# Altium PCB Mini-Rambo.PcbDoc (part 2 of 3)
Units mil, origin at the board's own origin, x right, y up, seen from the top; angles counter-clockwise.
Board outline 4133.86 x 2795.28 mil, 4 copper layers (Top, GND, Supply, Bottom), stack 61.811 mil thick; 295 components, 208 nets, 992 pads, 488 vias.
Unrouted connection lines stored in the file: 73.
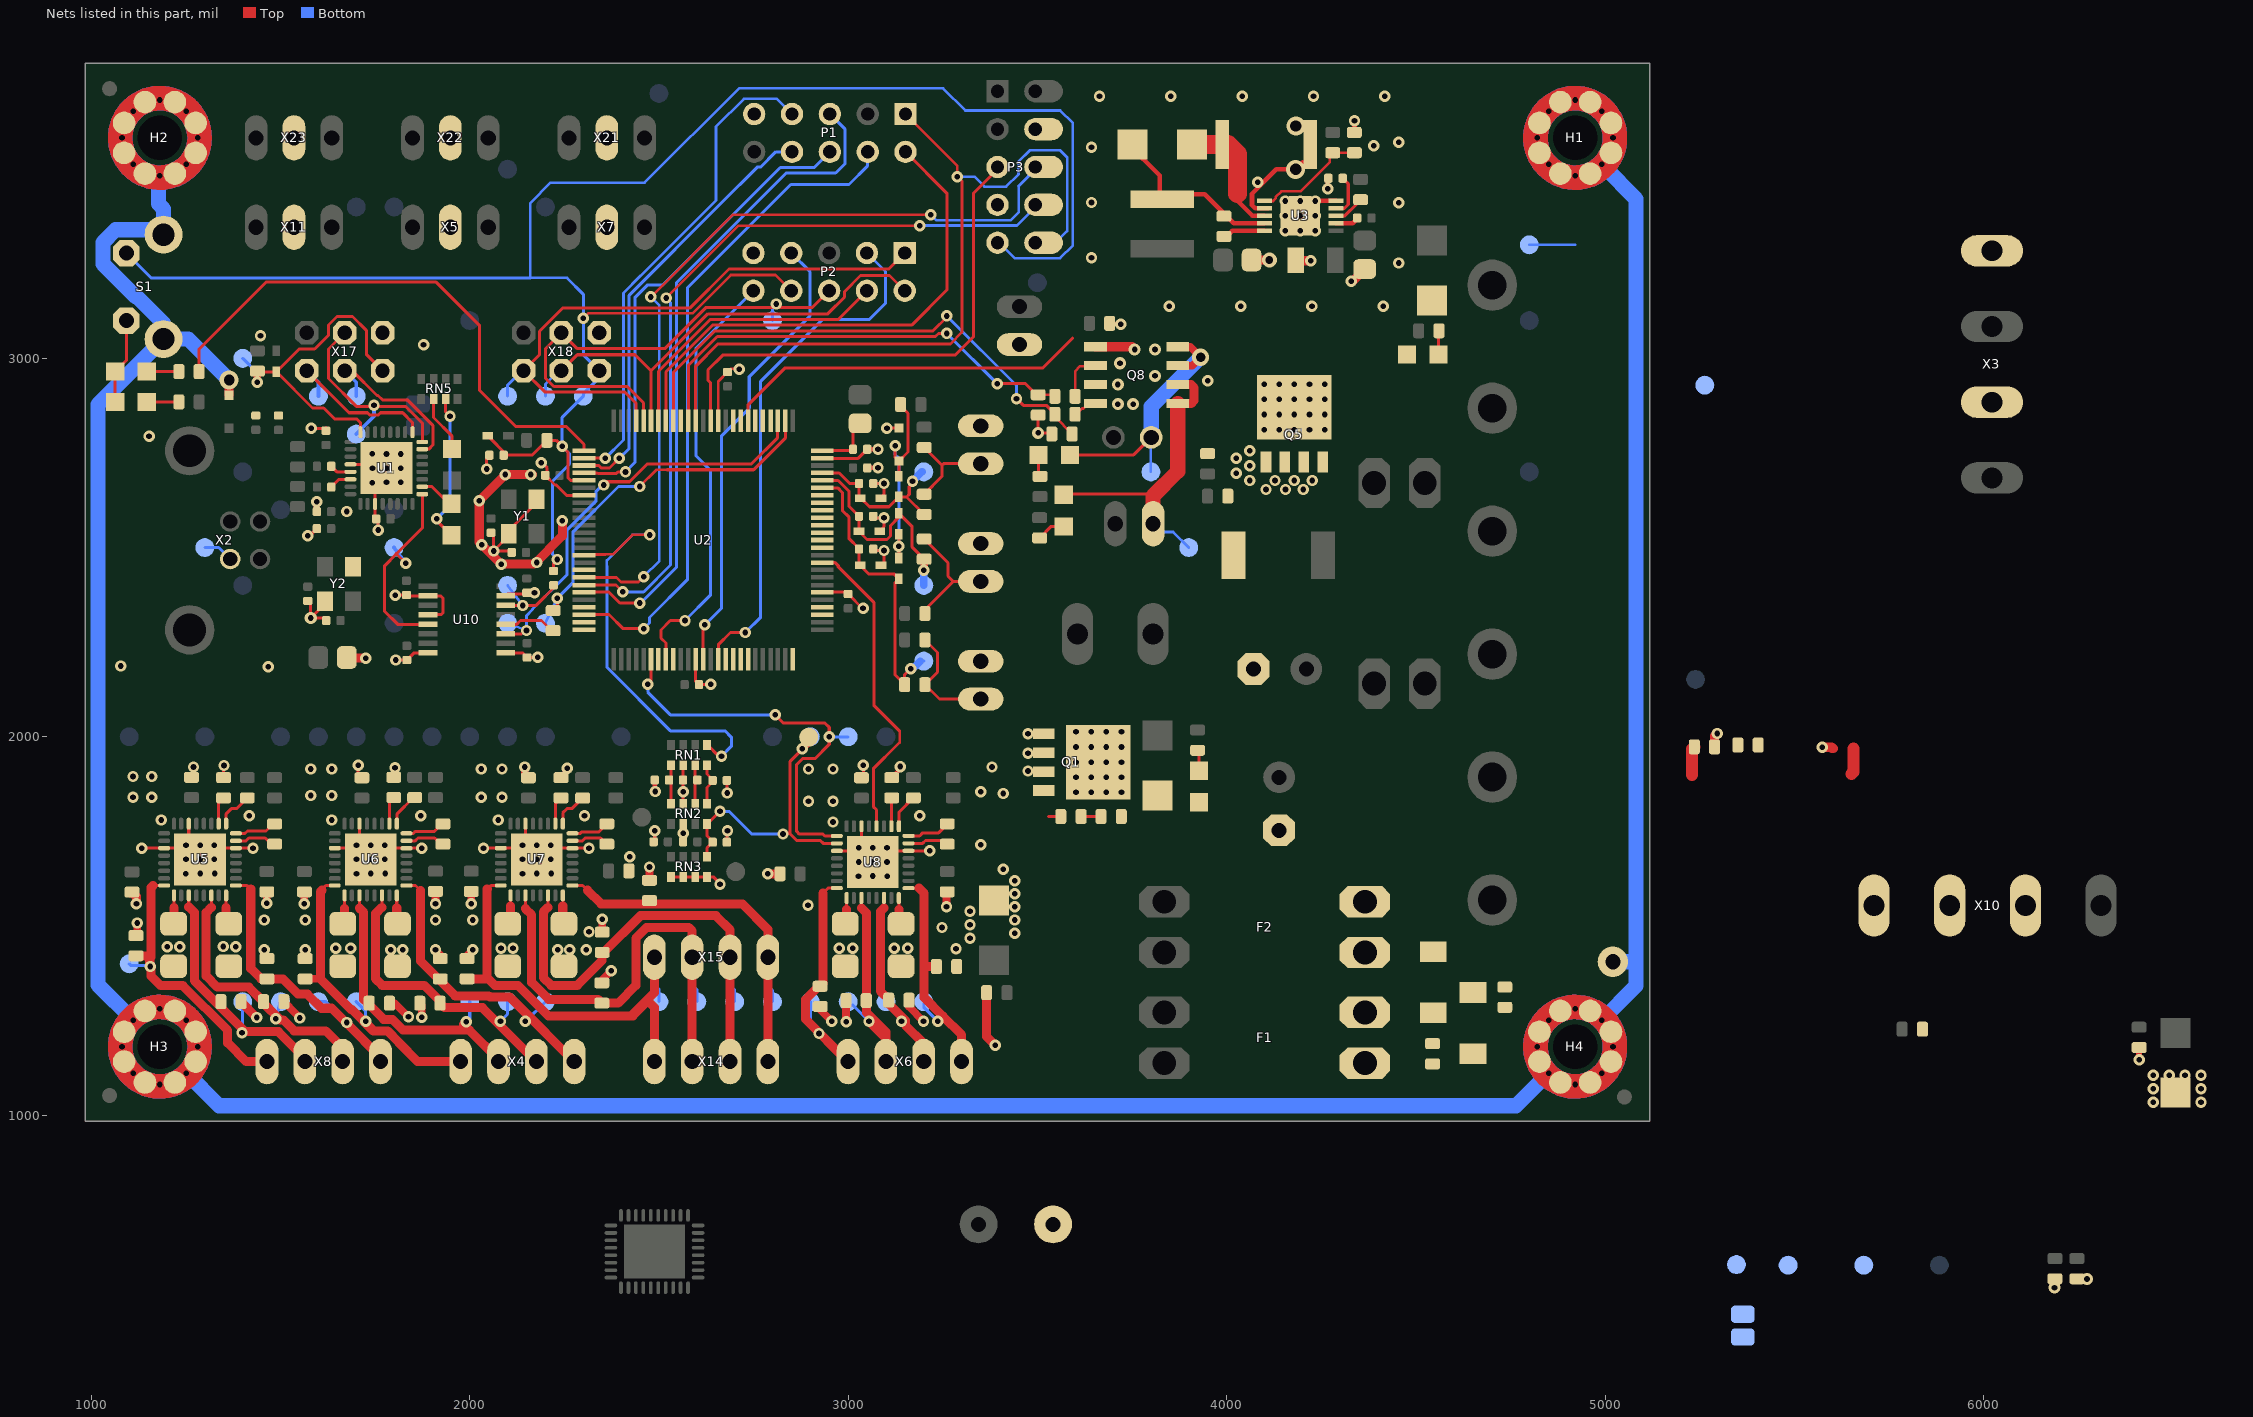
[diagram p4: the nets of this part, all layers, seen from the top]

## Via types
v1: diameter 30, hole 15, Top to Bottom, tented both sides, 231 vias
v2: diameter 30, hole 15, Top to Bottom, 224 vias
v3: diameter 19.68, hole 7.87, Top to Bottom, 12 vias
v4: diameter 32, hole 15, Top to Bottom, tented both sides, 11 vias
v5: diameter 50, hole 28, Top to Bottom, tented both sides, 3 vias
v6: diameter 50, hole 30, Top to Bottom, 3 vias
v7: diameter 45, hole 25, Top to Bottom, tented both sides, 1 vias
v8: diameter 40, hole 20, Top to Bottom, 1 vias
v9: diameter 30, hole 15, Top to Bottom, tented top, 1 vias
v10: diameter 32, hole 15, Top to Bottom, 1 vias

## Nets (pads, with @x,y where several pads share a name; then routed paths per layer and width w, separated by ;. In a path a pad name is that pad's centre, name@x,y a point inside that pad or via, vN(x,y) a via of type N, cw(c..) or ccw(c..) an arc to the next point about the centre after c; other vN are vias at no path point) (continued)
E0-MS2: U2.85 U8.12 | length 833.1
  Top w7: 3096.62,1945.71 3136,1985.09 3136,2014.91
  Top w8: U2.85@2931.79,2460 2965.76,2460 2973.79,2451.97 2973.79,2449.07 3067.68,2355.18 3067.68,2083.23 3136,2014.91 ; U8.12@3074.8,1763.61 3074.8,1807.06 3066.47,1815.39 3066.47,1915.56 3096.62,1945.71
E0-STEP: TP13.TP U2.56 U8.17 | length 1099.9
  Top w8: v2(2470.47,2138.78) 2478.99,2147.3 U2.56@2478.99,2205 ; v2(2807.24,2058.07) 2829.31,2036 2939,2036 2950,2025 v1(2950,2000) 2950,1980 2912.28,1942.28 2879.28,1942.28 2863.72,1926.72 2863.72,1750.15 2871.06,1742.82 2933.58,1742.82 2938.38,1738.02 U8.17@2969.96,1738.02
  Bottom w8: v2(2470.47,2138.78) 2470.47,2117.77 2530.18,2058.07 v2(2807.24,2058.07) ; v1(2950,2000) TP13.TP@3000,2000
E1-DIR: U2.42
E1-EN: U2.75
E1-STEP: U2.57
E-REF: C20.1 RN2.8 RN3.1 TP12.TP TP70.TP U8.18 | length 770.8
  Top w8: RN3.1@2626.97,1683.07 2626.97,1706.69 C20.1@2641.73,1721.46 2641.73,1723.42 2626.97,1738.19 RN2.8@2626.97,1769.26 2627.53,1769.26 v2(2661.42,1803.15) ; 2844.83,1745 2864.02,1725.82 2926.54,1725.82 2934.03,1718.33 U8.18@2969.96,1718.33 ; 2846.72,1743.11 2846.72,1935 2880,1968.28 v1(2878.28,1968.28)
  Top w10: v2(2827.76,1743.11) 2829.65,1745 2844.83,1745
  Top w20: v1(2878.28,1968.28) 2895.67,1985.67 TP70.TP@2895.67,1999.02
  Bottom w8: v2(2661.42,1803.15) 2685.04,1803.15 2745.08,1743.11 v2(2827.76,1743.11)
E-REF-PWM: RN1.1 U2.40 | length 1136.2
  Top w7: 2358.27,2482.3 2378.6,2482.3 2429.76,2533.46 v2(2475.39,2533.46)
  Top w8: U2.40@2301.83,2480 2304.13,2482.3 2358.27,2482.3 ; RN1.1@2626.97,1978.35 2628.65,1978.35 2658.18,1948.82 v2(2665.35,1948.82)
  Bottom w7: 2362.41,2451.62 2362.41,2466.11 2429.76,2533.46 v2(2475.39,2533.46)
  Bottom w8: 2362.41,2451.62 2362.41,2183.41 2530.02,2015.8 2674.51,2015.8 2691.35,1998.96 2691.35,1974.82 v2(2665.35,1948.82)
FAN-0: R21.1 R71.1 U2.17 | length 1398
  Top w7: R71.1@3546.07,2852.37 3546.07,2845.86 R21.1@3591.73,2800.19
  Top w8: U2.17@2538.05,2834.96 2538.05,2962.87 2647.88,3072.7 3224.23,3072.7 v1@3262.28,3110.75 ; v1(3444.88,2893.7) 3462.82,2875.76 3523.52,2875.76 3543.31,2855.97 3543.31,2855.12 R71.1@3546.07,2852.37
  Bottom w8: v1(3260.83,3112.2) 3444.88,2928.15 v1(3444.88,2893.7)
FAN-1: R9.1 R16.1 U2.15 | length 1223.3
  Top w7: R16.1@3501.97,2903.74 3541.94,2903.74 R9.1@3546.07,2899.61
  Top w8: U2.15@2577.42,2834.96 2577.42,2981.03 2654.09,3057.7 3230.45,3057.7 3238.69,3065.94 v1(3260.83,3065.94) ; v2(3393.7,2933.07) 3468.51,2933.07 R16.1@3503.94,2897.64
  Bottom w8: v1(3260.83,3065.94) v2(3393.7,2933.07)
FAN-2: U2.6
FGND: "Net Tie.1" D16.C H1.1 H2.1 H3.1 H4.1 pad.0 S1.3 S1.4 | length 8904
  Top w24: D16.C@1364.17,2902.56 v5(1364.17,2942.91)
  Bottom w40: H3.1@1111.1,1251.1 1018,1344.2 1018,2878.24 S1.4@1190.73,3050.98 ; H2.1@1181.1,3482.68 1177.17,3478.74 1177.17,3408.46 1190.73,3394.9 S1.3@1190.73,3326.98 1177.73,3339.98 1064.05,3339.98 1030.73,3306.66 1030.73,3249.29 1118.05,3161.98 1121.42,3161.98 1190.73,3092.66 S1.4@1190.73,3050.98 1256.11,3050.98 v5(1364.17,2942.91) ; H3.1@1251.1,1111.1 1337.28,1024.93 3905.51,1024.93 4765.09,1024.93 H4.1@4851.26,1111.1 ; H4.1@4991.26,1251.1 5082.35,1342.2 5082.35,1397.64 ; 4998.42,3511.46 4998.42,3505.52 5082.35,3421.58 5082.35,1397.64 ; pad.0@5020.67,1405.51 5074.48,1405.51 5082.35,1397.64
GND: "Net Tie.2" C1.2 C3.2 C4.2 C5.2 C6.2 C7.2 C8.2 C9.2 C17.2 C18.2 C19.2 C20.2 C21.2 C22.2 C23.2 C24.2 C25.2 C26.2 C29.2 C30.2 C31.1 C34.2 C35.2 C36.1 C39.2 C41.1 C44.2 C45.2 C46.1 C47.2 C48.2 C49.2 C50.2 C51.2 C52.2 C53.2 C54.2 C55.2 C56.2 C57.2 C58.2 C59.2 C60.2 C61.2 C62.2 C64.2 C65.2 C66.2 C68.1 C69.2 C71.2 C72.2 C73.2 C74.2 C75.2 C76.2 C77.2 C78.2 C79.2 C80.2 C81.2 C82.2 C83.2 C84.2 C85.2 C86.2 C87.2 C88.2 C89.2 D2.A D5.A D7.A D8.A D12.A D13.A D15.A LED1.C LED7.C P1.9 P2.9 P3.4 P3.7 Q1.1 Q1.2 Q1.3 Q5.1 Q5.2 Q5.3 Q8.1 Q8.3 R4.2 R7.2 R8.2 R10.2 R13.1 R14.2 R15.2 R16.2 R19.2 R20.2 R21.2 R24.2 R43.2 R57.2 RN1.6 RN2.3 RN2.6 RN3.5 RN3.6 RN3.7 RN3.8 S1.2 TP67.TP TP69.TP U2.11 U2.32 U2.62 U2.81 U2.99 U3.5 U3.7 U3.11 U5.6 U5.14 U5.19 U5.33 U6.6 U6.14 U6.19 U6.33 U7.6 U7.14 U7.19 U7.33 U8.6 U8.14 U8.19 U8.33 U10.9 U10.15 X1.1 X5.2 X7.2 X10.2 X10.4 X11.2 X12.1 X18.6 X21.2 X22.2 X23.2 X27.1 X28.1 Y1.2 Y1.4 | length 6278.1
  Top w7: U2.11@2656.79,2834.96 2656.79,2939.57 C52.2@2681.1,2963.88 2689.66,2972.44 2712.6,2972.44 v2@2711.76,2971.6 ; C25.2@3691.14,3092.52 3718.5,3092.52 v2(3720.47,3090.55)
  Top w8: LED7.C@1063,2885 LED1.C@1063,2965 1092.73,2994.73 S1.2@1092.73,3099.98 ; v2(1132.87,1705.54) U5.19@1192.4,1705.54 U5.33@1257.87,1705.54 ; U5.14@1257.4,1770.5 1257.4,1706.01 U5.33@1257.87,1705.54 ; C31.1@1349.42,1892.1 1349.42,1923.23 v2(1350.39,1924.21) ; v2(1427.34,1705.54) U5.6@1381.89,1705.54 1316.93,1705.54 v1(1287.4,1676.01) U5.33@1257.87,1705.54 ; U6.19@1643.31,1705.54 U6.33@1708.78,1705.54 ; v1(1705,1925) 1705,1901.77 C23.2@1715,1891.77 ; U6.14@1708.31,1770.5 1708.31,1706.01 U6.33@1708.78,1705.54 ; v2(1873.03,1705.71) 1872.86,1705.54 U6.6@1832.8,1705.54 1767.84,1705.54 v1(1738.31,1676.01) U6.33@1708.78,1705.54 ; v2(2036.42,1705.71) 2036.59,1705.54 U7.19@2081.93,1705.54 U7.33@2147.4,1705.54 ; C1.2@2044.09,2744.09 2044.09,2708.86 v2(2045.28,2707.68) ; C58.2@2056.1,2539.07 2062.99,2532.18 v2(2062.99,2491.14) ; U10.9@2095.13,2222.04 2139.18,2222.04 C68.1@2151.57,2209.65 ; U10.15@2095.13,2372.54 2099.59,2377 2146.98,2377 C69.2@2150.59,2380.61 2170.76,2380.61 v2(2171.16,2381) ; C57.2@2110.92,2487.2 2106.98,2491.14 v2(2062.99,2491.14) ; U7.14@2146.93,1770.5 2146.93,1706.01 U7.33@2147.4,1705.54 ; C68.1@2151.57,2209.65 2180.12,2209.65 v2(2179.43,2210.34) ; Y1.2@2176.56,2627.99 2176.56,2618.49 2103.15,2545.07 2103.15,2531.29 v2(2062.99,2491.14) ; v2(2188.98,2724.41) 2190.95,2724.41 2204.72,2710.63 2204.72,2696.17 C9.2@2199.5,2690.94 2225.09,2665.35 2227.69,2665.35 2228.02,2665.68 2255.59,2638.11 U2.32@2301.83,2638.11 ; C41.1@2241.14,1891.93 2249,1899.79 2249,1918.29 2255.9,1925.19 v2@2255.9,1913.38 ; v2(2314.96,1705.71) 2314.79,1705.54 U7.6@2271.42,1705.54 2206.46,1705.54 v1(2176.93,1676.01) U7.33@2147.4,1705.54 ; v2@2488.19,1753.94 2488.87,1753.25 C48.2@2488.87,1722.44 ; RN3.5@2531.72,1629.5 RN3.6@2563.72,1629.5 RN3.7@2595.47,1629.5 RN3.8@2626.97,1629.5 2627.39,1629.92 2643.7,1629.92 2661.42,1612.2 v2(2661.42,1610.24) ; RN2.3@2563.72,1822.83 2563.72,1854.08 v2(2563.98,1854.33) 2563.68,1854.63 C21.2@2563.68,1885.83 ; RN1.6@2563.72,1924.77 C21.2@2563.72,1885.87 ; U2.62@2597.1,2205 2597.1,2146.31 C7.2@2605.61,2137.8 2635.83,2137.8 v2(2636.81,2138.78) ; C20.2@2679.43,1721.46 2679.43,1750.3 v2(2681.1,1751.97) ; C19.2@2679.43,1884.84 2679.43,1852.28 v2(2680.25,1851.47) ; U2.81@2931.79,2382 2995.27,2382 C8.2@3000,2377.27 3039.37,2337.9 3039.37,2334.65 v2@3045.39,2340.67 ; U2.99@2931.79,2736.54 2932.48,2735.84 3026.5,2735.84 C26.2@3050.5,2759.84 ; U8.19@2969.96,1698.65 U8.33@3035.43,1698.65 ; U8.14@3034.96,1763.61 3034.96,1699.12 U8.33@3035.43,1698.65 ; C17.2@3035,1891.77 3040,1896.77 v2(3040,1925) ; C4.2@3066.24,2496.06 3070.19,2492.12 v2(3094.48,2492.12) 3094.48,2460.62 D5.A@3086.61,2452.76 ; C56.2@3066.24,2582.68 3070.19,2578.74 v2(3094.48,2578.74) 3094.48,2555.11 D15.A@3082.68,2543.31 ; C59.2@3066.24,2669.29 v2(3094.49,2669.29) 3094.49,2641.73 D13.A@3082.68,2629.92 ; v2(3102.36,2814.96) 3103.06,2815.65 D12.A@3133.86,2815.65 ; v2(3215.55,1698.82) 3215.38,1698.65 U8.6@3159.45,1698.65 3094.49,1698.65 v1(3064.96,1669.12) U8.33@3035.43,1698.65 ; R16.2@3501.97,2850.19 3501.97,2803.15 3535.23,2803.15 R21.2@3538.19,2800.19 ; 3529.53,1789.37 R43.2@3561.81,1789.37 ; C21.2@2563.68,1885.83 C21.2@2563.72,1885.87
  Top w12: C47.2@2488.87,1885.83 2488.87,1856.6 v2(2490.16,1855.32) ; C6.2@3050.5,2710.63 v2(3078.74,2710.63) ; C26.2@3050.5,2759.84 v2(3078.74,2759.84) ; C46.1@3115.16,1892.1 3137.8,1914.74 v2(3137.8,1921.26) ; U3.7@4110.04,3396.26 U3.7@4100.2,3396.26 4075.51,3396.26 4067.12,3404.65 4067.12,3435.13 4131.58,3499.59 v6(4182.64,3499.59) 4201.05,3518 ; v2(4234.06,3415.94) U3.5@4289.17,3415.94 ; v1(4267,3448) 4267,3474 C49.2@4269,3476 ; R24.2@4337.63,3597.93 4338,3598.31 v2(4338,3628)
  Top w16: v1(6411.42,1146.65) C60.2@6411.42,1178.94
  Top w20: C71.2@1103.39,1585.63 C71.2@1107.24,1589.49 ; C66.2@1118,1474.77 1121,1477.77 v2(1121,1508) ; v2(1463.58,1560.04) C29.2@1463.58,1590.35 ; C61.2@1522.52,1286 C61.2@1508.52,1300 1508.52,1299.48 v1(1551,1257) ; v2(1562.99,1559.06) C72.2@1562.99,1590.35 ; C64.2@1787.77,1296 1802,1296 v1(1838,1260) ; C55.2@1868,1296 1873,1291 v1(1873,1259) ; v2(1909.45,1437.01) 1922,1424.46 C50.2@1922,1413.77 ; v2(1909.45,1559.06) C34.2@1909.45,1591.34 ; C82.2@1993,1413.77 1993,1422.13 v2(2007.87,1437.01) ; v2(2003.94,1559.06) C73.2@2003.94,1591.34 ; v2(2145,1920) 2145,1901.77 C18.2@2155,1891.77 ; C80.2@2349,1349.77 2349,1357 v1(2374,1382) ; C78.2@2350,1483.77 v1(2350,1518) ; C76.2@2475,1620.77 v1(2475,1656) ; C83.2@2926,1287.23 2926,1279 v1(2957,1248) ; C81.2@2994.23,1303 2994.23,1247.77 v1(2995,1247) ; C79.2@3160.77,1304 3160.77,1286.23 v1(3199,1248) ; v2(3259.84,1551.18) 3259.84,1588.39 C44.2@3261.81,1590.35
  Top w24: C71.2@1107.24,1589.49 1119.09,1577.64 v2@1119.09,1558.07 ; C65.2@1395.77,1300 1395.77,1299.23 v1(1437,1258) ; v2(2062.99,2491.14) 2048.23,2491.14 v2@2039.37,2500 ; v2@2165.35,2692.91 v2(2094.2,2692.91) v2(2025.1,2623.82) 2025.1,2514.27 v2@2039.37,2500 ; v2(2244.65,2570.87) 2244.65,2530.94 2169.92,2456.2 v2(2083.17,2456.2) v2@2039.37,2500 ; v2(2787.4,1637.8) C74.2@2819.68,1637.8 ; C3.2@3365.94,1323.82 3365.94,1207.87 v1(3388.78,1185.04) ; Q8.1@3653.54,3030.71 3749.8,3030.71 v4(3756.89,3023.62) ; C45.2@4066,3260 v8(4113,3260) ; C30.2@4182.83,3259 4183.83,3258 v1(4222,3258) ; v1(4329,3204) 4333,3204 C35.2@4365,3236 ; C85.2@5289.57,1973.43 5289.57,2002.17 v1(5296.26,2008.86) ; v1(5573.82,1972.44) 5599.21,1972.44 5603.15,1968.5 5600.39,1968.5 ; v4(6187.99,544.29) 6188.98,545.28 C88.2@6188.98,567.72 ; C89.2@6247.05,567.72 6272.83,567.72 v4(6273.62,566.93)
  other v1: 6448.82,1034.45 6574.8,1034.45 6448.82,1069.88 6574.8,1069.88 6448.82,1105.31 6490.81,1105.32 6532.81,1105.32 6574.8,1105.31 3321.85,1467.52 3439.96,1481.05 3321.85,1503.44 3439.96,1515.75 3321.85,1539.37 3439.96,1550.44 3439.96,1585.14 3439.96,1619.83 3027.2,1631.43 3064.96,1631.91 3103.35,1631.72 1249.64,1638.32 1700.55,1638.32 2139.17,1638.32 1287.4,1638.8 1325.79,1638.61 1738.31,1638.8 1776.69,1638.61 2176.93,1638.8 2215.31,1638.61 3410,1650 3027.56,1669.12 3102.36,1669.12 1250,1676.01 1324.8,1676.01 1700.91,1676.01 1775.71,1676.01 2139.53,1676.01 2214.33,1676.01 3027.56,1706.52 3064.96,1706.52 3102.36,1706.52 1250,1713.41 1287.4,1713.41 1324.8,1713.41 1700.91,1713.41 1738.31,1713.41 1775.71,1713.41 2139.53,1713.41 2176.93,1713.41 2214.33,1713.41 3350,1715 2895,1830 2960,1830 1110,1840 1160,1840 2030,1840 2085,1840 1580,1845 1635,1845 3410,1850 3350,1855 1110,1895 1160,1895 3475.39,1909.45 1580,1915 1635,1915 2030,1915 2085,1915 2895,1915 2960,1915 3380,1920 3475.39,1956.69 3475.39,2007.87 4104.33,2653.54 4155.51,2653.54 4202.76,2653.54 4061.02,2677.17 4127.95,2677.17 4179.13,2677.17 4226.38,2677.17 4025.59,2696.85 4061.02,2716.54 4025.59,2736.22 4061.02,2755.91 4082,3465
  other v2: 1456.69,1437.01 1564.96,1437.01 1791.34,1437.01 1822.83,1437.01 2232.28,1437.01 2263.78,1437.01 2308,1437 3285,1440 1645.67,1440.94 1685.04,1440.94 2082.68,1440.94 2114.17,1440.94 2976.38,1440.94 3011.81,1440.94 3122.05,1440.94 3157.48,1440.94 1200.79,1444.88 1233.27,1444.88 1381.89,1444.88 1348.43,1445.87 2315,1485 3248.03,1496.06 1456.69,1515.75 1564.96,1515.75 1909.45,1515.75 2007.87,1515.75 2893.7,1555.12 1119.09,1559.06 2423,1683 2563.98,1745.08 2489.17,1751.97 2960,1775 1185,1780 1635,1780 2075,1780 1417.32,1791.34 1870.08,1791.34 2303.15,1791.34 3188.98,1791.34 2258,1917 1802.25,1918.4 1270,1920 3039.37,2339.57 2177.17,2460.63 2031.5,2507.87 2161.42,2692.91 2711.75,2971.6 3848.5,3138 4037,3138 4225.5,3138 4414,3138 4455,3252 3643,3266 4155.32,3337.2 4194.69,3337.2 4234.06,3337.2 4155.32,3376.57 4194.69,3376.57 4234.06,3376.57 3643,3412 4455,3411.5 4155.32,3415.94 4194.69,3415.94 3643,3558 4388.58,3561.61 4455,3571 3664,3693 3852.5,3693 4041,3693 4229.5,3693 4418,3693
  other v4: 3501.97,2803.15 3712.6,2878.94 3752.95,2878.94 3712.6,2931.1 3811.02,2953.74 3718.5,2987.2 3811.02,3023.62
  other v6: 4183,3614
GND1: C2.1 C11.2 C12.2 C13.2 C14.2 C15.2 C16.2 C63.2 C67.1 C70.2 R72.1 TP47.TP U1.3 U1.28 U1.33 U10.2 U10.4 U10.8 X2.4 X17.6 Y2.2 Y2.4 | length 968.6
  Top w8: C13.2@1571.85,2358.95 1579.72,2351.08 v10(1579.72,2313.98) ; v2(1571.85,2531.5) 1577.5,2531.5 C11.2@1596,2550 ; v2(1580.71,2814.96) 1618.19,2814.96 C16.2@1620,2816.77 ; C15.2@1595.47,2595.53 C15.2@1596,2595 ; C12.2@1613.61,2307.09 C12.2@1620.76,2307.09 1613.87,2313.98 v10(1579.72,2313.98) ; Y2.2@1617.54,2358.12 1617.54,2351.79 v10(1579.72,2313.98) ; C2.1@1675.2,2209.65 C2.1@1677.17,2207.68 ; U1.28@1685,2720 1770,2720 v1(1780,2710) 1750,2680 U1.3@1750,2615.51 1750,2578.44 C14.2@1752.65,2575.79 1757.87,2570.57 v2(1757.87,2546.26) ; v2(1803.15,2374.02) 1803.83,2374.7 C70.2@1832.68,2374.7 ; v2(1804.13,2202.76) C67.1@1833.66,2202.76 1852.94,2222.04 U10.8@1889.76,2222.04 ; C70.2@1833.36,2371.06 1834.84,2372.54 U10.2@1889.76,2372.54 1922.74,2372.54 1929.13,2366.14 1929.13,2327.76 1923.92,2322.54 U10.4@1889.76,2322.54
  Top w16: C15.2@1595.47,2595.53 v2(1595.47,2621.06)
  Top w24: C2.1@1677.17,2207.68 v2(1725.39,2207.68)
  Bottom w8: TP47.TP@1300,2500 1336.53,2500 X2.4@1366.84,2469.68
  other v1: 1467.52,2185.04 1077.76,2187.01 1675.2,2595.47 1742.6,2671.61 1780,2672.6 1817.4,2672.6 1742.8,2710 1817.4,2710 1780,2747.4 1817.4,2747.4 1742.31,2747.76 1152.56,2794.29 1877.95,3036.42 1446.85,3060.04
HEAT-0: R42.1 R43.1 U2.7 | length 1025.9
  Top w8: U2.7@2735.79,2834.96 2735.79,2877.52 2832.34,2974.07 3513.78,2974.07 3593.42,3053.71 ; R43.1@3615.35,1789.37 R42.1@3668.11,1789.37
HEAT-1: U2.16
L13: R33.1 U2.26 | length 1444.6
  Top w8: R33.1@1284.77,2965 1284.77,3024.93 1461.38,3201.54 1911.11,3201.54 2025.13,3087.52 2025.13,2916.44 2121,2820.56 2254.24,2820.56 2301.83,2772.98 U2.26@2301.83,2756.22
MISO2: TP43.TP U1.17 X17.1 | length 446.9
  Top w8: X17.1@1569.53,2967.56 1680.76,2856.32 1729.91,2856.32 1736.23,2850 1757.77,2850 1764.09,2856.32 1822.81,2856.32 1848.9,2830.24 U1.17@1848.9,2805
  Bottom w10: X17.1@1569.53,2967.56 1600,2937.09 TP43.TP@1600,2900
MOSI2: TP42.TP U1.16 X17.4 | length 580.8
  Top w8: X17.4@1669.53,3067.56 1626.53,3024.56 1626.53,2947.09 1700.29,2873.32 1830.42,2873.32 1874.49,2829.25 U1.16@1874.49,2779
  Bottom w10: TP42.TP@1700,2800 1747,2847 v1(1747,2876)
NetC10_1: C10.1 TP29.TP U10.14 | length 229.4
  Top w8: U10.14@2095.13,2347.54 2140.54,2347.54 2175.88,2347.54 2225.39,2397.05 C10.1@2225.39,2406.5
  Top w10: v1(2140,2347) 2140.54,2347.54 v1@2142,2349
  Bottom w7: TP29.TP@2100,2400 v1(2140,2347)
NetC19_1: C19.1 RN1.8 RN2.1 | length 116.6
  Top w8: RN2.1@2626.97,1822.83 2626.97,1866.14 2644.69,1883.86 2626.97,1901.58 RN1.8@2626.97,1924.77
NetC21_1: C21.1 RN1.7 RN2.2 | length 106.8
  Top w8: RN2.2@2595.47,1822.83 2595.47,1879.92 C21.1@2601.38,1885.83 2595.47,1891.73 RN1.7@2595.47,1924.77
NetC26_1: C26.1 L2.2 U2.100 | length 166.7
  Top w8: U2.100@2931.79,2756.22 3009.17,2756.22 C26.1@3012.8,2759.84 3012.8,2838.97 L2.2@3009.24,2842.52
NetC27_2: C27.2 U5.9 | length 99
  Top w8: U5.9@1356.3,1770.5 1356.3,1796.26 1370.08,1810.04 1383.54,1810.04 C27.2@1412.06,1838.55
NetC28_1: C28.1 U5.7 | length 112.1
  Top w8: U5.7@1381.89,1725.22 1408.84,1725.22 1416.15,1732.54 1459.39,1732.54 1475.59,1716.34 C28.1@1484.25,1716.34
NetC28_2: C28.2 U5.8 | length 112.7
  Top w8: U5.8@1381.89,1744.91 1406.32,1744.91 1412.4,1750.98 1461.61,1750.98 1480.51,1769.88 C28.2@1484.25,1769.88
NetC31_2: C31.2 U5.10 | length 73.4
  Top w8: U5.10@1336.61,1770.5 1336.61,1825.75 C31.2@1349.42,1838.55
NetC32_2: C32.2 U6.9 | length 94
  Top w8: U6.9@1807.21,1770.5 1807.21,1795.16 1851.42,1839.37 C32.2@1858.27,1839.37
NetC33_1: C33.1 U6.7 | length 106.2
  Top w8: U6.7@1832.8,1725.22 1855.77,1725.22 1863.26,1732.71 1907.29,1732.71 1923.66,1716.34 C33.1@1929.13,1716.34
NetC33_2: C33.2 U6.8 | length 106.7
  Top w8: U6.8@1832.8,1744.91 1851.21,1744.91 1856.3,1750 1907,1750 1926.88,1769.88 C33.2@1929.13,1769.88
NetC36_2: C36.2 U6.10 | length 70.7
  Top w8: U6.10@1787.52,1770.5 C36.2@1787.52,1832.1 ; C36.2@1795.39,1832.1 C36.2@1801.85,1838.55
NetC37_2: C37.2 U7.9 | length 97.2
  Top w8: U7.9@2245.83,1770.5 2245.83,1798.98 2256.89,1810.04 2269.88,1810.04 C37.2@2298.23,1838.39
NetC38_1: C38.1 U7.7 | length 100.7
  Top w8: U7.7@2271.42,1725.22 2297.7,1725.22 2305.19,1732.71 2345.83,1732.71 C38.1@2362.2,1716.34
NetC38_2: C38.2 U7.8 | length 101.8
  Top w8: U7.8@2271.42,1744.91 2272.23,1744.09 2290.77,1744.09 2294.71,1748.03 2340.35,1748.03 C38.2@2362.2,1769.88
NetC40_1: C40.1 U3.10 | length 111.7
  Top w12: C40.1@3991,3331.23 4009.23,3331.23 4015.2,3337.2 U3.10@4100.2,3337.2
NetC40_2: C40.2 D9.C L1.1 U3.9 | length 475.6
  Top w12: D9.C@3740.26,3566 3823,3483.26 3823,3433.74 3942.03,3433.74 3991,3384.77 4018.88,3356.89 U3.9@4100.2,3356.89
NetC41_2: C41.2 U7.10 | length 74.1
  Top w8: U7.10@2226.14,1770.5 2226.14,1823.39 C41.2@2241.14,1838.39
NetC42_2: C42.2 U8.9 | length 90.8
  Top w8: U8.9@3133.86,1763.61 3133.86,1800.17 C42.2@3172.24,1838.55
NetC43_1: C43.1 U8.7 | length 109.4
  Top w8: U8.7@3159.45,1718.33 3196.88,1718.33 3204.37,1725.82 3252.33,1725.82 C43.1@3261.81,1716.34
NetC43_2: C43.2 U8.8 | length 116.3
  Top w8: U8.8@3159.45,1738.02 3188.8,1738.02 3196.85,1746.06 3239.17,1746.06 3261.81,1768.7 C43.2@3261.81,1769.88
NetC46_2: C46.2 U8.10 | length 75.4
  Top w8: U8.10@3114.17,1763.61 3114.17,1837.57 C46.2@3115.16,1838.55
NetC47_1: C47.1 RN1.5 RN2.4 | length 106.2
  Top w8: RN2.4@2531.72,1822.83 2531.72,1880.68 C47.1@2526.57,1885.83 2531.72,1890.98 RN1.5@2531.72,1924.77
NetC49_1: C49.1 U3.4 | length 112
  Top w8: U3.4@4289.17,3396.26 4311.03,3396.26 4321.48,3406.71 4321.48,3461.22 C49.1@4306.7,3476
NetC50_1: C50.1 TP52.TP U6.1 X4.1 | length 819.7
  Top w8: U6.1@1832.8,1607.01 1856.57,1607.01 1870.08,1593.5
  Top w24: 1870.08,1593.5 1870.08,1406.98 1961.62,1315.44 2050.27,1315.44 2053.41,1312.3 2105.41,1312.3 2127.86,1289.86 X4.1@2275.98,1141.73
  Bottom w8: v1(2147,1248) 2148,1248 TP52.TP@2200,1300
NetC51_1: C51.1 TP53.TP U5.1 X8.1 | length 809.5
  Top w8: U5.1@1381.89,1607.01 1411.69,1607.01 1421.26,1597.44 ; v1@1675,1238 1675,1242.86 v1(1675,1245)
  Top w24: 1421.26,1597.44 1421.26,1388 1449.03,1360.23 C51.1@1464,1360.23 1506.29,1360.23 1546.52,1320 1571,1320 1608.27,1282.73 1635.12,1282.73 1675,1242.86 1764.17,1153.68 X8.1@1764.17,1141.73
  Bottom w8: TP53.TP@1600,1300 1620,1300 v1(1675,1245)
NetC55_1: C55.1 TP51.TP U6.30 X4.2 | length 805.9
  Top w8: 1767.84,1549.33 U6.30@1767.84,1581.01
  Top w24: 1767.84,1549.33 1750.98,1532.48 1750.98,1361 1768.68,1343.3 1879.7,1343.3 1921.54,1301.46 C55.1@1921.54,1296 1933.1,1284.44 2033.28,1284.44 X4.2@2175.98,1141.73
  Bottom w8: v1(2081,1248) 2100,1267 TP51.TP@2100,1300
NetC61_1: C61.1 TP50.TP U5.30 X8.2 | length 743.5
  Top w8: 1316.93,1549.21 U5.30@1316.93,1581.01
  Top w24: 1316.93,1549.21 1303.26,1535.55 1303.26,1368.36 1332.94,1338.69 1416.29,1338.69 C61.1@1454.98,1300 1454.98,1295.83 1499.08,1251.73 1507.11,1251.73 1535.84,1223 1619,1223 1664.17,1177.83 X8.2@1664.17,1141.73
  Bottom w8: v1(1487,1255) TP50.TP@1500,1300
NetC64_1: C64.1 TP55.TP U6.27 X4.3 | length 787
  Top w8: 1708.31,1547.6 U6.27@1708.31,1581.01
  Top w24: 1708.31,1547.6 1719.49,1536.42 1719.49,1306.1 C64.1@1731.91,1293.68 ; C64.1@1734.23,1296 1734.23,1291.36 1772.15,1253.44 1795.6,1253.44 1824.04,1225 1998.96,1225 ; v1@1983.98,1239.98 1998.96,1225 ; X4.3@2075.98,1141.73 2075.98,1147.97 1998.96,1225
  Bottom w8: v1(1991,1247) 2000,1256 TP55.TP@2000,1300
NetC65_1: C65.1 TP54.TP U5.27 X8.3 | length 700.3
  Top w8: 1257.4,1550.67 U5.27@1257.4,1581.01
  Top w24: 1257.4,1550.67 1272.26,1535.81 1272.26,1355.52 1407.06,1220.73 1494.27,1220.73 1564.17,1150.83 X8.3@1564.17,1141.73
  Bottom w8: v1(1398,1218) 1400,1220 TP54.TP@1400,1300
NetC66_1: C66.1 TP56.TP U5.24 X8.4 | length 793.6
  Top w8: 1163.11,1607.01 U5.24@1192.4,1607.01
  Top w24: C66.1@1118,1421.23 1154.25,1421.23 ; 1163.11,1607.01 1157.48,1601.38 1157.48,1418 1154.25,1421.23 ; X8.4@1464.17,1141.73 1409.45,1141.73 1360,1191.18 1360,1223.95 1241.63,1342.32 1183.38,1342.32 1157.48,1368.21 1157.48,1395 1154.25,1398.23 1154.25,1421.23
  Bottom w8: TP56.TP@1100,1400 1104,1396 v1@1156.48,1396
  other v1: 1156,1393
NetC75_1: C75.1 TP57.TP U6.24 X4.4 | length 853.2
  Top w8: 1609.25,1594.49 1614.17,1589.57 1614.17,1601.38 1619.8,1607.01 U6.24@1643.31,1607.01
  Top w20: C75.1@1565,1360.23 1605.31,1360.23
  Top w24: 1609.25,1594.49 1605.32,1590.55 1605.32,1360.24 1686.55,1279 1689.08,1279 1745.64,1222.44 1782.76,1222.44 1813.17,1192.03 1813.17,1190.83 1862.27,1141.73 X4.4@1975.98,1141.73
  Bottom w8: TP57.TP@1700,1300 1725,1275 1725,1254 v1@1731,1248
  other v1: 1725,1248
NetC76_1: C76.1 TP60.TP U7.1 X14.1 X15.1 | length 1036.6
  Top w8: U7.1@2271.42,1607.01 2298.5,1607.01 2311.02,1594.49
  Top w24: 2311.02,1594.49 2347.19,1558.32 2720.22,1558.32 2787.8,1490.75 X15.1@2787.8,1417.32 X14.1@2787.8,1141.73
  Bottom w8: X15.1@2787.8,1417.32 2787,1416.53 2787,1343 2800,1330 TP60.TP@2800,1300
NetC77_1: C77.1 TP61.TP U8.1 X6.1 | length 651.9
  Top w8: U8.1@3159.45,1600.12 3187.28,1600.12 ; v1(3237,1248) 3250.41,1261.41
  Top w24: 3187.28,1600.12 3200.79,1586.61 3200.79,1394 ; C77.1@3233.23,1393 3201.79,1393 3200.79,1394 ; X6.1@3299.61,1141.73 3299.61,1212.2 3250.41,1261.41 3200.79,1311.02 3200.79,1394
  Bottom w8: TP61.TP@3200,1300 3200,1285 v1(3237,1248)
NetC78_1: C78.1 TP58.TP U7.30 X14.2 X15.2 | length 1298.5
  Top w8: 2206.46,1548.98 U7.30@2206.46,1581.01
  Top w24: 2206.46,1548.98 2194.52,1537.04 2194.52,1363.66 2214.87,1343.3 2284,1343.3 2350,1409.3 C78.1@2350,1430.23 2354.17,1430.23 2451.26,1527.32 2650.35,1527.32 2687.8,1489.88 X15.2@2687.8,1417.32 X14.2@2687.8,1141.73
  Bottom w8: X15.2@2687.8,1417.32 2687.8,1343.2 2700,1331 TP58.TP@2700,1300
NetC79_1: C79.1 TP59.TP U8.30 X6.2 | length 551.9
  Top w8: 3094.49,1547.24 U8.30@3094.49,1574.12
  Top w24: 3094.49,1547.24 3085.26,1538.02 3085.26,1328.12 C79.1@3108.31,1305.08 ; C79.1@3107.23,1304 3107.23,1294.38 3151,1250.61 3151,1238 3199.61,1189.39 X6.2@3199.61,1141.73
  Bottom w8: TP59.TP@3100,1300 3141,1259 v1(3141,1248)
NetC80_1: C80.1 TP63.TP U7.27 X14.3 X15.3 | length 1311.3
  Top w8: 2146.93,1545.98 U7.27@2146.93,1581.01
  Top w24: 2146.93,1545.98 2163.52,1529.4 2163.52,1350.82 2208.23,1306.1 2339.13,1306.1 C80.1@2349,1296.23 2392.02,1296.23 2438.8,1343 2438.8,1467.62 2467.5,1496.32 2578.48,1496.32 2587.8,1487.01 X15.3@2587.8,1417.32 X14.3@2587.8,1141.73
  Bottom w8: X15.3@2587.8,1417.32 2587.8,1344.2 2600,1332 TP63.TP@2600,1300
NetC81_1: C81.1 TP62.TP U8.27 X6.3 | length 540.7
  Top w8: U8.27@3034.96,1574.12 3034.96,1547.72 3035.43,1547.24
  Top w24: 3035.43,1547.24 3048.61,1534.07 3048.61,1271 3099.61,1220 3099.61,1203.39 ; v1(3055,1248) 3099.61,1203.39 ; X6.3@3099.61,1185 3099.61,1203.39
  Bottom w8: TP62.TP@3011.63,1291.71 3055,1248.34 v1(3055,1248)
NetC82_1: C82.1 TP65.TP U7.24 X14.4 X15.4 | length 1280.7
  Top w8: 2046.26,1597.44 2055.83,1607.01 U7.24@2081.93,1607.01
  Top w24: C82.1@1993,1360.23 2042.46,1360.23 2045.89,1363.66 ; 2046.26,1597.44 2045.89,1597.07 2045.89,1363.66 ; X14.4@2487.8,1141.73 2487.8,1284.84 2470.42,1302.22 2430.86,1262.66 2426.5,1262.66 ; X15.4@2487.8,1417.32 2487.8,1323.95 2426.5,1262.66 ; 2045.89,1363.66 2066.25,1343.3 2127.19,1343.3 2207.83,1262.66 2426.5,1262.66
  Bottom w8: X15.4@2487.8,1417.32 2487.8,1345.2 2500,1333 TP65.TP@2500,1300
NetC83_1: C83.1 TP64.TP U8.24 X6.4 | length 649.4
  Top w8: 2933.07,1586.61 2946.57,1600.12 U8.24@2969.96,1600.12
  Top w24: 2933.07,1586.61 2933.07,1347.84 C83.1@2926,1340.77 2921.83,1340.77 2887.31,1306.25 2887.31,1254.02 X6.4@2999.61,1141.73 X6.4@3000,1142.13
  Bottom w8: TP64.TP@2900,1300 2900,1239 v1(2923,1216)
NetC85_1: C85.1 F1.1 FB1.2 | length 76.3
  Top w32: 5229.92,1899.61 5229.92,1967.32 C85.1@5236.02,1973.43
NetC87_1: C87.1 F2.1 FB2.2 | length 69.3
  Top w32: 5650.98,1901.57 5656.69,1907.28 5656.69,1968.5
NetD6_A: D6.A LED2.C Q1.MB TP17.TP X3.4 | length 121
  Bottom w7: TP17.TP@4800,3300 4921,3300
  other v1: 3602.13,1853.07 3642.13,1853.07 3682.13,1853.07 3722.13,1853.07 3602.13,1893.07 3642.13,1893.07 3682.13,1893.07 3722.13,1893.07 3602.13,1933.07 3642.13,1933.07 3682.13,1933.07 3722.13,1933.07 3602.13,1973.07 3642.13,1973.07 3682.13,1973.07 3722.13,1973.07 3602.13,2013.07 3642.13,2013.07 3682.13,2013.07 3722.13,2013.07
NetD9_A: D9.A R13.2 U3.8 | length 341.9
  Top w12: 4029.12,3435 4029.12,3415.78 4068.33,3376.57 U3.8@4100.2,3376.57
  Top w50: D9.A@3909,3565 R13.2@3988.86,3565 4003.86,3565 4029.12,3539.74 4029.12,3435
NetD10_A: D10.A LED6.C Q5.MB TP18.TP X3.2
  other v1: 4099.13,2811.77 4139.13,2811.77 4179.13,2811.77 4219.13,2811.77 4259.13,2811.77 4099.13,2851.77 4139.13,2851.77 4179.13,2851.77 4219.13,2851.77 4259.13,2851.77 4099.13,2891.77 4139.13,2891.77 4179.13,2891.77 4219.13,2891.77 4259.13,2891.77 4099.13,2931.77 4139.13,2931.77 4179.13,2931.77 4219.13,2931.77 4259.13,2931.77 3949.8,2940.94
NetLED1_A: LED1.A R33.2 | length 84.9
  Top w8: LED1.A@1146.34,2965 R33.2@1231.23,2965
NetLED2_A: LED2.A R40.1 | length 55.6
  Top w8: R40.1@3923.23,1964.37 3927.17,1960.43 LED2.A@3927.17,1910.43
NetLED3_A: LED3.A R70.1 | length 76.7
  Top w8: R70.1@3505.9,2525.4 3536.61,2556.1 LED3.A@3569.88,2556.1
NetLED3_C: LED3.C Q8.5 TP23.TP X9.1 | length 831.5
  Top w8: LED3.C@3569.88,2639.44 3572.43,2641.99 3800.53,2641.99 3805.91,2636.61
  Top w24: Q8.5@3870.81,2880.71 3906.3,2880.71 3914.37,2888.78 3914.37,2922.24 3905.91,2930.71 Q8.5@3870.81,2930.71
  Top w40: X9.1@3805.91,2562.99 3805.91,2636.61 3870.81,2701.52 Q8.5@3870.81,2880.71
  Bottom w7: X9.1@3805.91,2562.99 3827.9,2541 3859,2541 TP23.TP@3900,2500
NetLED4_A: LED4.A RN5.6 | length 151.5
  Top w8: RN5.6@1904.28,2892.29 1904.28,2843.76 1952.76,2795.28 LED4.A@1952.76,2760.83
NetLED6_A: LED6.A R58.1 | length 63.5
  Top w8: LED6.A@4560.04,3009.84 4560.04,3071.65 R58.1@4561.22,3072.83
NetLED7_A: LED7.A R35.2 | length 84.9
  Top w8: LED7.A@1146.34,2885 R35.2@1231.23,2885
NetLED8_A: LED8.A R69.1 | length 66.7
  Top w8: R69.1@3502.95,2678.34 LED8.A@3502.95,2745.08
NetLED8_C: LED8.C Q8.7 TP22.TP X35.2 | length 732.5
  Top w8: LED8.C@3586.29,2745.08 3754.53,2745.08 X35.2@3800.79,2791.34
  Top w20: Q8.7@3870.81,2980.71 3908.86,2980.71 v7(3931.1,3002.95) 3931.1,3003.42 3903.81,3030.71 Q8.7@3870.81,3030.71
  Bottom w7: TP22.TP@3800,2700 3800,2790.55 X35.2@3800.79,2791.34
  Bottom w40: X35.2@3800.79,2791.34 3800.79,2872.64 v7(3931.1,3002.95)
NetLED10_A: LED10.A RN5.7 | length 397.2
  Top w8: v2(1912.49,2575.91) 1910.43,2573.82 LED10.A@1951.77,2532.48 ; RN5.7@1936.02,2892.29 1936.02,2858.84 v2(1947.7,2847.16)
  Bottom w8: v2(1912.49,2575.91) 1947.7,2611.12 v2(1947.7,2847.16)
NetQ1_4: Q1.4 R42.2 | length 4.2
  Top w8: Q1.4@3513.78,1855.11 Q1.4@3516.73,1858.07
NetQ5_4: Q5.4 R56.2
NetQ8_2: Q8.2 R9.2 | length 126.3
  Top w7: R9.2@3599.61,2899.61 3599.61,2965.75 3613.19,2979.33 3652.16,2979.33 Q8.2@3653.54,2980.71
NetQ8_4: Q8.4 R71.2 | length 66.6
  Top w7: R71.2@3599.61,2852.37 3602.37,2852.37 3618.11,2868.11 3622.05,2868.11 ; 3621.42,2867.48 3622.05,2868.11 ; Q8.4@3653.54,2880.71 3634.65,2880.71 3622.05,2868.11
NetR3_1: R3.1 U3.2 | length 56.9
  Top w12: U3.2@4289.17,3356.89 4333.27,3356.89 R3.1@4342.32,3365.95
NetR4_1: R4.1 U5.32 | length 78.1
  Top w8: 1356.3,1548.23 U5.32@1356.3,1581.01
  Top w24: 1356.3,1548.23 1356.3,1512.68 R4.1@1363.19,1505.79
NetR5_1: R5.1 R6.2 X12.2 | length 308.7
  Top w8: R5.1@3202.95,2255.9 3236,2222.85 3236,2170.85 R6.2@3202.95,2137.8 3241.14,2099.61 X12.2@3350.39,2099.61
NetR7_1: R7.1 U5.25 | length 76.6
  Top w8: 1218.4,1548.13 U5.25@1218.4,1581.01
  Top w24: R7.1@1217.52,1504.8 1218.4,1505.68 1218.4,1548.13
NetR8_1: R8.1 U6.32 | length 76.1
  Top w8: 1807.09,1547.24 1807.09,1580.89 U6.32@1807.21,1581.01
  Top w24: 1807.09,1547.24 1807.09,1507.76 R8.1@1809.06,1505.79
NetR10_1: R10.1 U6.25 | length 73.3
  Top w8: 1669.29,1546.26 U6.25@1669.31,1577.07
  Top w24: R10.1@1664.37,1505.79 1669.31,1510.72 1669.29,1546.26
NetR11_1: R11.1 U3.3 | length 76.4
  Top w8: U3.3@4289.17,3376.57 4312.57,3376.57 4344.86,3408.86 R11.1@4352.16,3408.86
NetR14_1: R14.1 U7.32 | length 76.5
  Top w8: 2245.83,1552.91 U7.32@2245.83,1581.01
  Top w24: 2245.83,1552.91 2245.83,1508.98 R14.1@2249.02,1505.79
NetR15_1: R15.1 U7.25 | length 78.3
  Top w8: 2107.93,1552.81 U7.25@2107.93,1581.01
  Top w24: R15.1@2100.39,1505.79 2107.93,1513.32 2107.93,1552.81
NetR19_1: R19.1 U8.32 | length 70.8
  Top w8: 3133.86,1543.31 U8.32@3133.86,1574.12
  Top w24: 3133.86,1543.31 3133.86,1511.69 R19.1@3139.76,1505.79
NetR20_1: R20.1 U8.25 | length 69.9
  Top w8: 2995.96,1543.31 U8.25@2995.96,1574.12
  Top w24: R20.1@2992.13,1505.79 2995.96,1509.62 2995.96,1543.31
NetR23_2: R23.2 R24.1 U3.6 | length 301.1
  Top w7: U3.6@4100.2,3415.94 4122.94,3415.94 4129.82,3422.82 4129.82,3426.51 4144.75,3441.44 4195.11,3441.44 4273,3519.33 4273,3535.85 R23.2@4280.55,3543.4 R24.1@4336.64,3543.4
NetR31_1: R31.1 R32.2 X27.2 | length 266.9
  Top w8: R32.2@3200.78,2640.95 3248.03,2688.2 3248.03,2717.32 ; R31.1@3200.78,2764.57 3248.03,2717.32 ; X27.2@3350.39,2721.65 3252.36,2721.65 3248.03,2717.32
NetR34_1: R34.1 U10.12 | length 152
  Top w8: U10.12@2095.13,2297.04 2123.81,2297.04 2134.12,2307.35 2189.65,2307.35 2217.67,2279.33 R34.1@2231.3,2279.33
NetR36_1: R36.1 R37.2 X28.2 | length 328.8
  Top w8: R36.1@3200.79,2333.86 3277.57,2410.63 ; R37.2@3200.78,2522.84 3263.78,2459.84 3263.78,2424.42 3277.57,2410.63 ; X28.2@3348.03,2412.99 X28.2@3350.39,2410.63 3277.57,2410.63
OVREF: D1.C D11.C D12.C D14.C R73.1 | length 583.2
  Top w8: v2(3124.02,2768.7) 3124.02,2738.19 D12.C@3133.86,2728.35 ; D1.C@3133.86,2472.44 v2(3133.86,2503.94) D14.C@3133.86,2535.43 ; D11.C@3133.86,2688.98 D12.C@3133.86,2728.35 ; R73.1@3138.59,2877.96 3138.59,2874.21 3157.86,2854.94 3157.86,2752.35 D12.C@3133.86,2728.35
  Bottom w8: v2(3124.02,2768.7) 3124.02,2746.06 3133.86,2736.22 v2(3133.86,2503.94)
PA0: U2.78
PB0_SD-SS: P2.4 U2.19 | length 770
  Top w8: U2.19@2498.68,2834.96 2498.68,2965.93 2635.45,3102.7 2973.76,3102.7 P2.4@3049.61,3178.54
PB1_SCK: P2.2 TP35.TP U2.20 X18.3 | length 1293.2
  Top w8: X18.3@2242.13,2967.56 2284.13,3009.56 2436.89,3009.56 2478.99,2967.46 ; U2.20@2478.99,2834.96 2478.99,2967.46 ; P2.2@3149.61,3178.54 3109.08,3219.07 3032.82,3219.07 2990.13,3176.39 2990.13,3161.76 2946.08,3117.7 2629.24,3117.7 2478.99,2967.46
  Bottom w8: TP35.TP@2200,2900 2200,2932 2235.56,2967.56 X18.3@2242.13,2967.56
PB2_MOSI: P2.6 TP36.TP U2.21 X18.4 | length 1310.8
  Top w8: U2.21@2459.31,2834.96 2459.31,2882.43 2416.18,2925.56 2222.07,2925.56 2200.13,2947.5 2200.13,3025.56 X18.4@2242.13,3067.56 2284.13,3025.56 2515.38,3025.56 2624.66,3134.85 v1@2810.04,3134.85 ; v1(2810.04,3143.7) 2818.89,3134.85 2905.91,3134.85 P2.6@2949.61,3178.54
  Bottom w8: TP36.TP@2800,3100 2800,3133.66 v1(2810.04,3143.7)
PB3_MISO: P2.1 TP34.TP U2.22 X18.1 | length 1639.1
  Top w8: U2.22@2439.62,2834.96 2439.62,2880.91 2409.97,2910.56 2199.13,2910.56 X18.1@2142.13,2967.56 2184.13,3009.56 2184.13,3071.62 2246.11,3133.6 2582.41,3133.6 2685.03,3236.22 3107.28,3236.22 P2.1@3149.61,3278.54
  Bottom w8: TP34.TP@2100,2900 2100,2929 2138.56,2967.56 X18.1@2142.13,2967.56
PC5: P2.10 U2.58 | length 1119.9
  Top w8: U2.58@2518.36,2205 2518.36,2247.65 2506.16,2259.84 2505.49,2260.52 2505.49,2282.42 2530.15,2307.08 v2@2555.11,2307.08
  Bottom w8: v2(2568.9,2307.09) 2635.83,2374.02 2635.83,2704.63 2598.38,2742.08 2598.38,3027.32 P2.10@2749.61,3178.54
PC6: U2.59
PD4: U2.47
PD5: P1.4 U2.48 | length 1768.7
  Top w8: U2.48@2301.83,2323 2368.11,2323 2405.27,2285.84 2459.24,2285.84 v2(2459.65,2285.43)
  Bottom w8: v2(2459.65,2285.43) 2474.92,2300.71 2474.92,2315.47 2575.79,2416.34 2575.79,3187.01 2848.43,3459.65 3001.97,3459.65 3051.57,3509.25 P1.4@3051.57,3545.67
PD6: U2.49
PD7: U2.50
PE2: U2.4
PE3: U2.5
PE6: U2.8 | length 27.2
  Top w8: U2.8@2715.79,2834.96 2715.79,2811.96 U2.8@2718.79,2808.96
PE7: U2.9
PF3: U2.94
PF4: U2.93
PF5: U2.92
PF6: U2.91
PG3: P1.8 U2.28 | length 1135.7
  Top w8: U2.28@2301.83,2716.85 2340.86,2716.85 2347.49,2710.22 2369.03,2710.22 2394.81,2735.99 v2(2395.26,2735.99)
  Bottom w8: v2(2395.26,2735.99) 2421.2,2761.93 2421.2,3166.72 2665.35,3410.87 2759.62,3505.14 2768.36,3505.14 2808.89,3545.67 P1.8@2851.57,3545.67
PG4: P1.6 U2.29 | length 1258.2
  Top w8: U2.29@2301.83,2697.17 2336.63,2697.17 2338.58,2695.22 2386.67,2695.22 2391.39,2699.93 v2(2411.53,2699.93)
  Bottom w8: v2(2411.53,2699.93) 2436.2,2724.6 2436.2,3160.51 2469.05,3193.35 2509.57,3193.35 2820.87,3504.65 2910.55,3504.65 P1.6@2951.57,3545.67
PH2: P1.1 P3.10 U2.14 | length 2179
  Top w7: P1.1@3151.57,3645.67 3288.39,3508.86 v1(3288.39,3480.32) 3300.84,3467.86 3300.84,3069.18 3270.04,3038.39
  Top w8: U2.14@2597.1,2834.96 2597.1,2979.5 2655.99,3038.39 3270.04,3038.39
  Bottom w7: v1(3288.39,3480.32) 3333.66,3480.32 3360.24,3453.74 3417.32,3453.74 3450,3486.42 3450,3520 3480,3550 3560.2,3550 3578.74,3531.46 3578.74,3336.61 3547.13,3305 P3.10@3500,3305
PH6: P1.2 U2.18 | length 1371.5
  Top w8: U2.18@2518.36,2834.96 2518.36,2964.4 2641.66,3087.7 3167.7,3087.7 3260.59,3180.59 3260.59,3436.65 P1.2@3151.57,3545.67
PH7: P1.7 U2.27 | length 1301.6
  Top w8: U2.27@2301.83,2736.54 2357.94,2736.54 v2(2358.26,2736.22)
  Bottom w7: 2450.79,3217.52 2650.85,3417.59 2650.85,3612.35 2724.2,3685.7 2811.55,3685.7 P1.7@2851.57,3645.67
  Bottom w8: v2(2358.26,2736.22) 2406.2,2784.16 2406.2,3172.94 2450.79,3217.52
PJ2: P2.3 U2.65 | length 1372.1
  Top w8: U2.65@2656.79,2205 2656.79,2243.41 2688.97,2275.59 v1(2728.35,2275.59)
  Bottom w8: v1(2728.35,2275.59) 2768.6,2315.84 2768.6,2939.33 2932.61,3103.35 3056.1,3103.35 3098.43,3145.67 3098.43,3229.72 P2.3@3049.61,3278.54
PJ3: U2.66
PJ4: U2.67
PJ5: U2.68
PJ6: U2.69
PJ7: U2.79 | length 2.8
  Top w8: U2.79@2929.79,2344 U2.79@2931.79,2342
PK0: U2.89
PK1: U2.88
PK2: U2.87
PWR-IN: C84.1 C86.1 FB1.1 FB2.1 TP66.TP X10.3
RD+: R2.2 U1.29 | length 57.1
  Top w8: R2.2@1634,2715 1648.84,2700.16 U1.29@1685,2700.16
RD-: R1.2 U1.30 | length 59.5
  Top w8: R1.2@1634,2660 1654.47,2680.47 U1.30@1685,2680.47
RESET: C1.1 C10.2 D3.A P2.8 P3.9 R46.1 S1.1 TP37.TP U2.30 X18.5 | length 5395.8
  Top w7: v1(2300.13,3106.23) 2313,3119.1 2588.41,3119.1 2689.78,3220.47 2807.68,3220.47 P2.8@2849.61,3178.54
  Top w8: D3.A@2047.24,2795.28 2097.64,2744.88 2097.64,2744.09 2164.57,2744.09 R46.1@2203.93,2783.46 2228.35,2783.46 v2(2244.09,2767.72) 2259.84,2751.97 2259.84,2684.37 2266.73,2677.48 U2.30@2301.83,2677.48 ; C10.2@2221.46,2438.29 v2@2221.46,2457.68
  Bottom w7: 2256.89,3212.6 2160,3212.6 2160,3410.2 2213.97,3464.18 2462.21,3464.18 2711.73,3713.7 3250.87,3713.7 3309.57,3655 3560,3655 3593.5,3621.5 3593.5,3298.59 3559.89,3264.97 3440.03,3264.97 P3.9@3400,3305
  Bottom w8: S1.1@1092.73,3277.98 1158.11,3212.6 2160,3212.6 ; v2(2231.41,2468.62) 2232.15,2468.62 2218.65,2482.12 2218.65,2675.2 2263.78,2720.32 2263.78,2748.03 v2(2244.09,2767.72) 2244.09,2844.09 TP37.TP@2300,2900 2300,2907 2342.13,2949.13 X18.5@2342.13,2967.56 2300.13,3009.56 v1(2300.13,3106.23) 2300.13,3169.36 2256.89,3212.6
RESET2: D4.A R47.1 TP44.TP U1.24 X17.5 | length 911.5
  Top w8: R47.1@1438,2961.82 1440.75,2964.57 D4.A@1489.17,2964.57 ; U1.24@1711,2805 1711,2830.09 1701.77,2839.32 1643.84,2839.32 1614.07,2869.09 1584.65,2869.09 D4.A@1489.17,2964.57 ; X17.5@1769.53,2967.56 1726.53,3010.56 1726.53,3074.03 1690,3110.56 1649.06,3110.56 1626.53,3088.03 1626.53,3061.09 1590,3024.56 1549.17,3024.56 D4.A@1489.17,2964.57
  Top w20: v1(1438,2937) R47.1@1438,2961.82
  Bottom w8: TP44.TP@1400,3000 1438,2962 v1(1438,2937)
RX0: R34.2 TP30.TP U2.2 | length 1009.4
  Top w7: v2(2448.82,2661.42) 2493.06,2705.66 2520.67,2705.66
  Top w8: R34.2@2231.3,2332.88 2232.28,2333.86 2232.28,2366.14 2232.17,2366.26 v2(2231.41,2366.26) ; 2520.67,2705.66 2750.31,2705.66 2833.79,2789.14 U2.2@2833.79,2834.96
  Bottom w7: TP30.TP@2200,2300 v2(2231.41,2366.26)
  Bottom w8: v2(2231.41,2366.26) 2272.41,2407.26 2272.41,2540.64 2393.19,2661.42 v2(2448.82,2661.42)
RX0-I: TP25.TP U1.9 U10.5 | length 566.6
  Top w7: 1806.83,2483.17 v1(1831,2459)
  Top w8: U1.9@1874.84,2641.46 U1.9@1874.49,2641.1 1874.49,2551.65 1806,2483.17 1775.17,2452.33 1775.17,2331.34 1809.46,2297.04 U10.5@1889.76,2297.04
  Top w10: 1806,2483.17 1806.83,2483.17
  Bottom w10: TP25.TP@1800,2500 1830,2460 v1(1831,2459)
RX1: P1.5 U2.45 | length 1771.5
  Top w8: U2.45@2301.83,2382 2368,2382 2396.65,2353.35 v2(2448.82,2353.35)
  Bottom w8: v2(2448.82,2353.35) 2451.77,2353.35 2545.79,2447.36 2545.79,3199.43 2836,3489.65 2967.01,3489.65 2992.1,3514.74 2992.1,3605.14 P1.5@2951.57,3645.67
RX2: P3.5 U2.12 | length 1351.7
  Top w8: U2.12@2636.79,2834.96 2636.79,2934.84 2629.78,2941.85 2629.78,2969.75 2668.41,3008.39 3282.46,3008.39 3330.84,3056.76 3330.84,3435.84 P3.5@3400,3505
RX3: P2.7 U2.63 | length 1211.4
  Top w8: U2.63@2616.79,2205 2616.79,2291.68 v1(2621.37,2296.26)
  Bottom w8: v1(2621.37,2296.26) 2665.59,2340.48 2665.59,2361.35 2665.83,2361.59 2665.83,2795.75 2738.6,2868.52 2738.6,2951.76 2899.61,3112.77 2899.61,3228.54 P2.7@2849.61,3278.54
RXL: LED10.C U1.10 | length 95.9
  Top w8: U1.10@1874.49,2660.79 1900.24,2660.79 1945.2,2615.82 LED10.C@1951.77,2615.82
SCK2: TP45.TP U1.15 X17.3 | length 457.6
  Top w8: X17.3@1669.53,2967.56 1689.44,2967.56 1755,2902 1757.77,2902 1769.45,2890.32 1835.07,2890.32 1902.49,2822.91 1902.49,2770.84 1891.65,2760 U1.15@1874.49,2760
  Bottom w10: X17.3@1669.53,2967.56 1700,2937.09 TP45.TP@1700,2900
SCL: P3.6 U2.43 | length 2150.7
  Top w7: 2433.07,2408.87 2445.29,2408.87 v2(2459.65,2423.23) ; v1(2478.35,3162.4) 2695.87,3379.92 v1(3218.5,3379.92)
  Top w8: U2.43@2301.83,2421 2387.61,2421 2399.74,2408.87 2433.07,2408.87
  Bottom w7: v2(2459.65,2423.23) 2500.89,2464.48 2500.89,3139.85 v1(2478.35,3162.4) ; v1(3218.5,3379.92) 3233.45,3364.97 3428.95,3364.97 3450.79,3386.81 3450.79,3455.79
  Bottom w8: 3450.79,3455.79 P3.6@3500,3505
SDA: P3.8 U2.44 | length 2104.1
  Top w7: v2(2518.82,3159.6) 2709.79,3350.57 v1(3188.98,3350.57)
  Top w8: U2.44@2301.83,2401 2386.4,2401 v2(2404.53,2382.87)
  Bottom w7: v1(3188.98,3350.57) 3189.38,3350.97 3445.97,3350.97 3500,3405 P3.8@3545,3405
  Bottom w8: v2(2404.53,2382.87) 2459.65,2382.87 2530.51,2453.74 2530.51,3147.91 v2(2518.82,3159.6)
THERM0: C59.1 D11.A D13.C R32.1 TP20.TP U2.97 | length 448.3
  Top w8: U2.97@2931.79,2697.17 2976.06,2697.17 3003.94,2669.29 C59.1@3028.54,2669.29 3028.54,2630.91 3030.82,2633.18 3056.08,2607.92 3107.92,2607.92 D11.A@3133.86,2633.86 3154.33,2633.86 ; v1(3170,2675) 3170,2670 3161.42,2661.42 3161.42,2640.94 3154.33,2633.86 ; R32.1@3200.78,2587.4 3154.33,2633.86
  Bottom w8: TP20.TP@3195,2700 TP20.TP@3200,2700
  Bottom w20: v1(3170,2675) TP20.TP@3195,2700
THERM1: C56.1 D14.A D15.C R37.1 TP21.TP U2.96 | length 584.7
  Top w8: U2.96@2931.79,2677.48 2973.65,2677.48 3001.56,2649.58 3001.56,2609.66 C56.1@3028.54,2582.68 D15.C@3028.54,2542.32 ; D15.C@3027.56,2543.31 D15.C@3028.54,2542.32 ; v1(3200,2440) v1@3200.78,2440.78 ; R37.1@3200.78,2469.29 3169.1,2500.98 3169.1,2555.31 D14.A@3133.86,2590.55 3133.86,2579.93 3111.86,2557.93 3111.86,2530.53 3102.63,2521.31 3049.56,2521.31 D15.C@3028.54,2542.32
  Top w20: v1@3200.78,2440.78 R37.1@3200.78,2469.29
  Bottom w20: TP21.TP@3200,2400 v1(3200,2440)
THERM2: C4.1 D1.A D5.C R6.1 TP15.TP U2.95 | length 773.4
  Top w8: U2.95@2931.79,2657.8 2972.13,2657.8 2984.56,2645.36 2984.56,2598.12 3001.56,2581.12 3001.56,2524.38 3028.54,2497.4 C4.1@3028.54,2496.06 3028.54,2455.71 D5.C@3031.5,2452.76 3053.5,2430.76 3120.43,2430.76 D1.A@3133.86,2417.32 3123.61,2407.07 3123.61,2163.6 R6.1@3149.41,2137.8 3149.41,2164.41 v1(3165,2180)
  Bottom w8: v1(3165,2180) v1@3170,2180 ; TP15.TP@3190,2200 TP15.TP@3200,2200
  Bottom w20: v1@3170,2180 TP15.TP@3190,2200
THERM3: U2.90
TX0: TP31.TP U2.3 U10.11 | length 1133.1
  Top w8: U10.11@2095.13,2272.04 2136.99,2272.04 ; v2(2354.33,2665.35) 2354.33,2670.22 2358.04,2673.93 2422.3,2673.93 2469.03,2720.66 2744.09,2720.66 2813.79,2790.35 U2.3@2813.79,2834.96
  Bottom w7: TP31.TP@2100,2300 v2(2150,2281)
  Bottom w8: v2(2150,2281) 2150,2320.23 2166,2336.23 2166,2337.62 2257.41,2429.03 2257.41,2546.85 2334.12,2623.56 2334.12,2649.09 2354.45,2669.42 2354.45,2670.34 2354.33,2670.22 v2(2354.33,2665.35)